# EAGLE board TSOC_MINIPROG_ADAPTER_R1_0 (EAGLE 6.6.0)
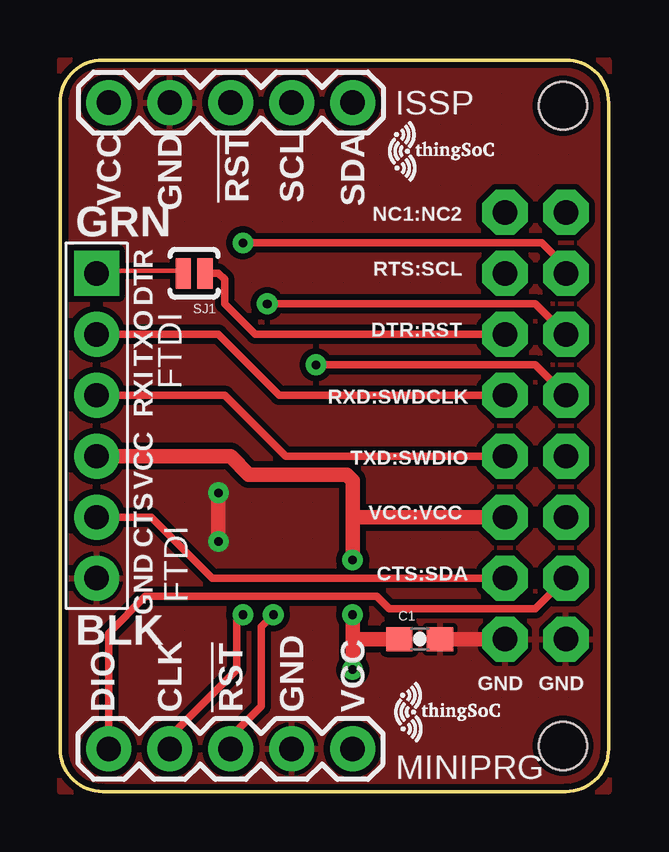
[diagram p0: board, top side]
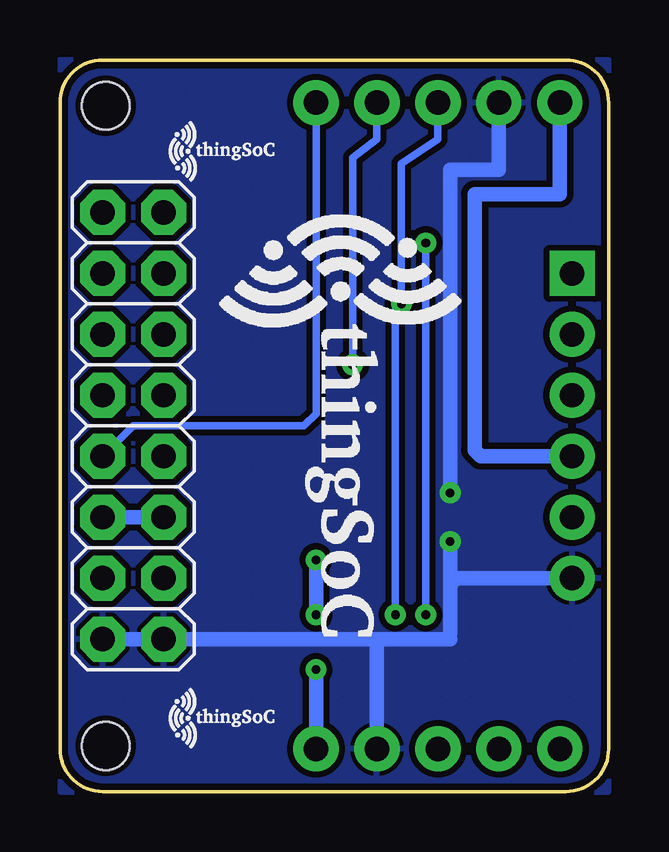
[diagram p1: board, bottom side, seen from below]

Size 22.86 x 30.48 mm. Coordinates in mm from the lower left corner, seen from the top.
Copper layers (1*16): Top 0.035mm / dielectric 1.5mm / Bottom 0.035mm
Design rules "PatternAgents_7mil": minimum track width 7mil, minimum drill 14mil, track to track 7mil, track to pad 7mil, pad to pad 7mil, via to via 7mil, smd to smd 7mil, copper to edge 7mil, drill to drill 7mil, minimum pad ring 12mil, minimum via ring 10mil, stop-mask expansion 4mil, vias tented up to drill 25mil, thermal gap 7mil

## Footprints (pad centres in the part's own frame; a part is rotated, then mirrored left to right if it is on the bottom)
0603-CAP = smd 1.1 x 1: 1 -0.85,0; 2 0.85,0
1X05 = drill 1.016 pad 1.88: 1 0,0; 2 2.54,0; 3 5.08,0; 4 7.62,0; 5 10.16,0
2X8 = drill 1.016 pad 1.88 octagon: 1 0,0; 2 0,2.54; 3 2.54,0; 4 2.54,2.54; 5 5.08,0; 6 5.08,2.54; 7 7.62,0; 8 7.62,2.54; 9 10.16,0; 10 10.16,2.54; 11 12.7,0; 12 12.7,2.54; 13 15.24,0; 14 15.24,2.54; 15 17.78,0; 16 17.78,2.54
FTDI_DEVICE_SIDE = drill 1.016 pad 1.88 square: P$1 -6.35,0 | drill 1.016 pad 1.88: P$2 -3.81,0; P$3 -1.27,0; P$4 1.27,0; P$5 3.81,0; P$6 6.35,0
JMP-2-NO = smd 0.635 x 1.27: 1 -0.45,0; 2 0.45,0
TSOC-BB-BRD-HALF = hole 2: 1.905,1.905; 28.575,1.905

## Placement (x,y rotation side)
C1  0.1uF  [0603-CAP]  14.99,6.35 0 top
ISSP  [1X05]  12.19,1.78 180 top
J1  [2X8]  18.54,6.35 90 bottom
JP1  FTDI_DEVICE  [FTDI_DEVICE_SIDE]  1.52,15.24 270 top
MINIPROG  [1X05]  2.03,28.7 0 top
SJ1  [JMP-2-NO]  5.59,21.59 180 top
U$1  TSOC-LOGO-SMALL  [TSOC-LOGO-SML]  14.48,26.67 0 top
U$2  TSOC-LOGO-SMALL  [TSOC-LOGO-SML]  17.53,26.67 0 bottom
U$3  TSOC-LOGO-SMALL  [TSOC-LOGO-SML]  14.73,3.3 0 top
U$4  TSOC-PCB-HALF  [TSOC-BB-BRD-HALF]  22.86,0 90 top
U$5  TSOC-LOGO-SMALL  [TSOC-LOGO-SML]  17.53,3.05 0 bottom
U$6  TSOC-LOGO-LRG  [TSOC-LOGO-LRG]  11.18,20.83 270 bottom

## Library data of the parts
C1 ISSP = SparkFun
J1 = TSOC_KITPROG_ADAPTER
JP1 MINIPROG = SparkFun-Connectors
SJ1 = PatternAgents-ProtoPads; BOM: EXCLUDE
U$1-U$6 = thingSoC

## Nets
!CTS: J1.3 JP1.P$5
!DTR: JP1.P$1 SJ1.2
!DTRR: J1.11 SJ1.1
!RST: ISSP.3 J1.12 MINIPROG.3
!RTS: J1.13
GND: C1.2 ISSP.2 J1.1 J1.2 JP1.P$6 MINIPROG.2
NC1: J1.15
NC2: J1.16
RXI: J1.7 JP1.P$3
SCL: ISSP.4 J1.14
SDA: ISSP.5 J1.4
SWDCLK: J1.10 MINIPROG.4
SWDIO: J1.8 MINIPROG.5
TXO: J1.9 JP1.P$2
VCC: C1.1 ISSP.1 J1.5 J1.6 JP1.P$4 MINIPROG.1

## Tracks (layer width: path | path; a pad name or v marks a point on that pad's centre or on a via)
!CTS
  Top 0.305: J1.3 6.35,8.89 3.81,11.43 JP1.P$5
!DTR
  Top 0.178: SJ1.2 4.98,21.69 1.6,21.69 JP1.P$1
!DTRR
  Top 0.305: J1.11 8.13,19.05 6.86,20.32 6.86,21.34 6.6,21.59 SJ1.1
!RST  (via drill 0.36)
  Top 0.305: v8.64,20.32 19.81,20.32 J1.12 | ISSP.3 7.11,2.29 8.38,3.56 8.38,6.86 v8.89,7.37
  Bottom 0.305: MINIPROG.3 7.11,27.18 8.64,26.16 v8.64,20.32 8.89,20.07 v8.89,7.37
GND  (via drill 0.36)
  Top 0.61: C1.2 J1.1 | v6.6,12.45 v6.6,10.41
  Bottom 0.61: J1.2 J1.1 9.65,6.35 | 9.65,6.35 ISSP.2 | 9.65,6.35 6.6,6.35 | MINIPROG.2 4.57,25.91 6.6,25.91 v6.6,12.45 | v6.6,10.41 6.6,8.64 | 6.6,8.64 6.6,6.6 | JP1.P$6 6.35,8.89 6.6,8.64
  pour Top (isolate 0.254, hatched): 0,0 0,30.48 22.86,30.48 22.86,0
  pour Bottom (isolate 0.254, hatched): 0,0 0,30.48 22.86,30.48 22.86,0
RXI
  Top 0.305: J1.7 9.4,13.97 6.86,16.51 JP1.P$3
SCL  (via drill 0.36)
  Top 0.305: J1.14 21.08,21.84 20.07,22.86 v7.62,22.86 | ISSP.4 4.57,2.29 7.37,5.08 7.37,7.11 v7.62,7.37
  Bottom 0.305: v7.62,7.37 v7.62,22.86
SDA
  Top 0.305: J1.4 19.81,7.62 13.72,7.62 13.21,8.13 3.56,8.13 2.03,6.6 ISSP.5
SWDCLK  (via drill 0.36)
  Top 0.305: v10.67,17.78 19.81,17.78 J1.10
  Bottom 0.305: MINIPROG.4 9.65,27.18 10.67,26.42 v10.67,17.78
SWDIO
  Bottom 0.305: MINIPROG.5 12.19,15.75 12.7,15.24 19.81,15.24 J1.8
TXO
  Top 0.305: J1.9 9.14,16.51 6.6,19.05 JP1.P$2
VCC  (via drill 0.36)
  Top 0.61: v12.19,5.08 12.19,6.1 | 12.19,6.1 v12.19,7.37 | C1.1 12.45,6.35 12.19,6.1 | v12.19,9.65 12.19,11.43 | 12.19,11.43 J1.5 | 12.19,11.43 12.19,12.95 11.94,13.21 7.87,13.21 7.11,13.97 JP1.P$4
  Bottom 0.61: MINIPROG.1 2.03,24.89 5.59,24.89 5.59,14.22 5.33,13.97 JP1.P$4 | J1.5 J1.6 | ISSP.1 v12.19,5.08 | v12.19,7.37 v12.19,9.65

## Text on the board
tPlace: ISSP | VCC | GND | !RST | SCL | SDA | NC1:NC2 | RTS:SCL | DTR:RST | FTDI | RXD:SWDCLK | TXD:SWDIO | VCC:VCC | CTS:SDA | FTDI | GND | GND | DIO | CLK | !RST | GND | VCC | MINIPRG